# Altium PCB DMX_8.pcbdoc
Units mil, origin at the board's own origin, x right, y up, seen from the top; angles counter-clockwise.
Board outline 4950 x 4640 mil, 1 copper layers (Top Layer); 37 components, 41 nets, 145 pads, 3 vias.
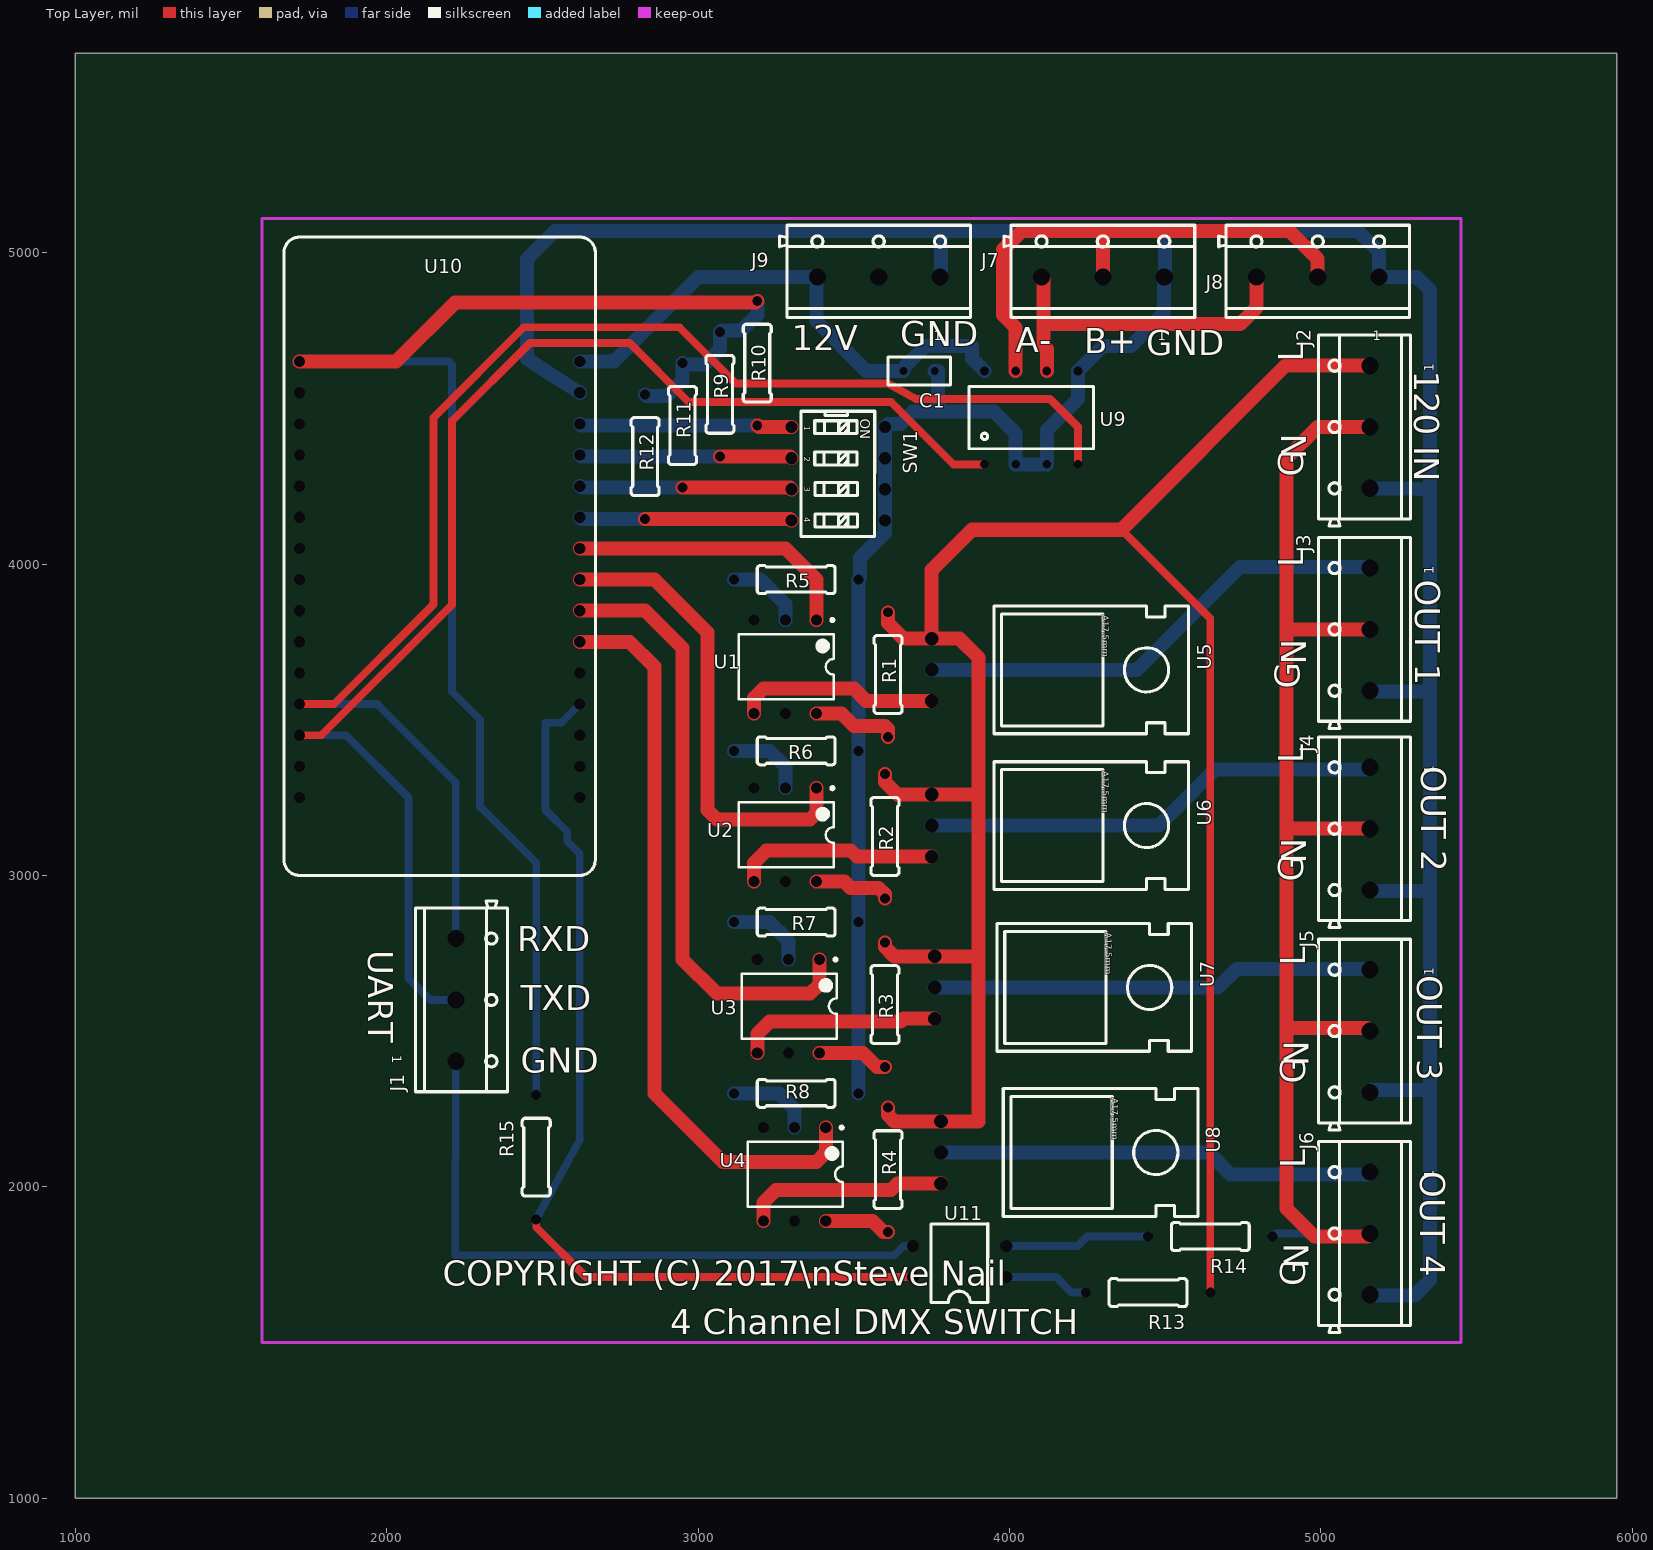
[diagram p0: Top Layer view]
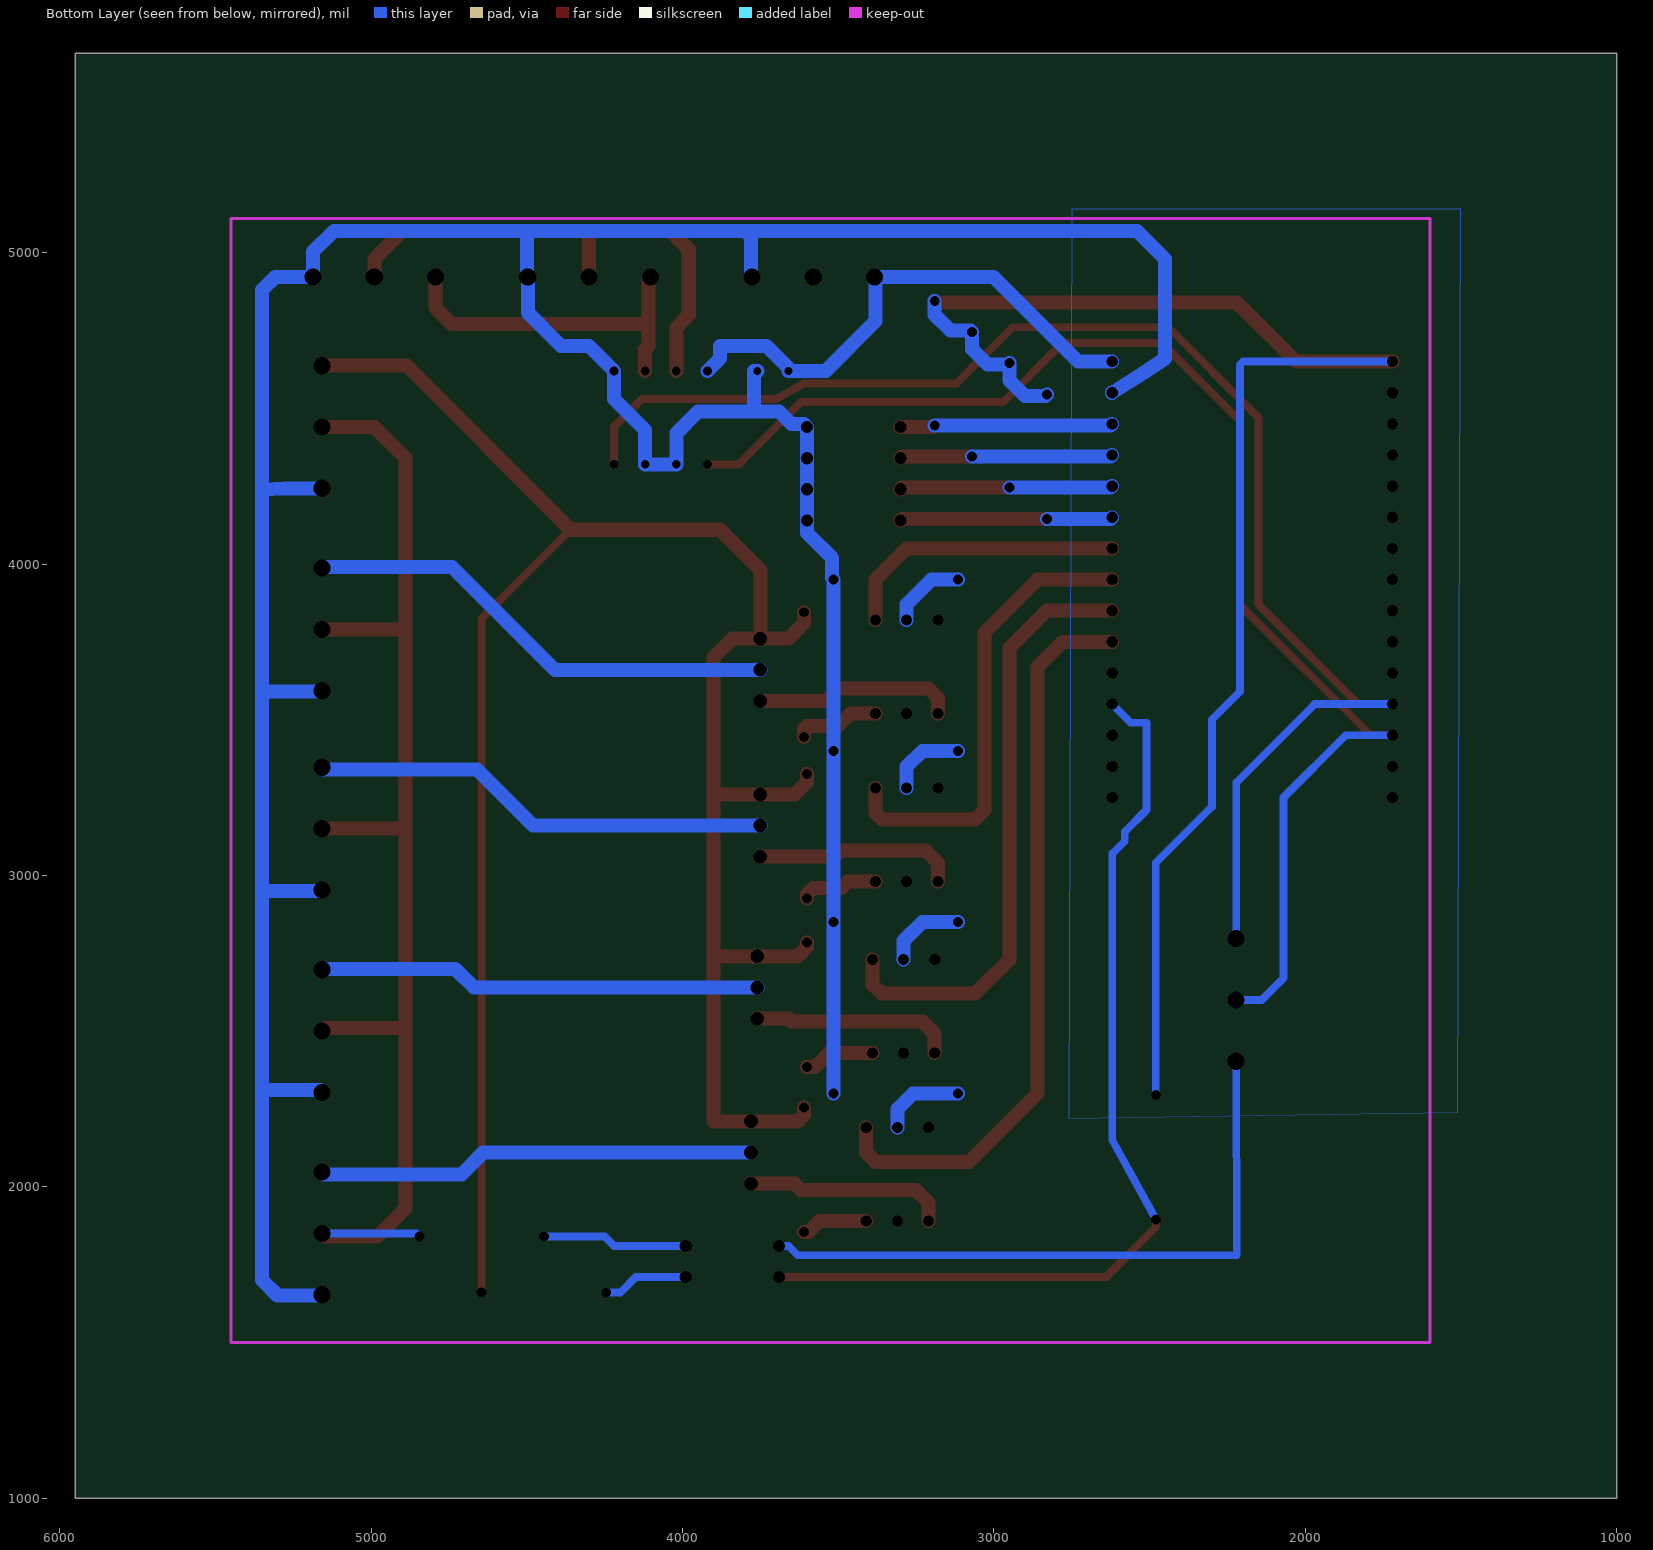
[diagram p1: Bottom Layer view, seen from below]

## Layer stack, top to bottom
Top Layer: signal copper (thickness not stored)

## Board outline
5950,1000 1000,1000 1000,5640 5950,5640

## Components (designator, comment, footprint, x,y, rotation, side; value= is the part's Value field where it differs from the comment)
C1 "CERAMIC-2.54" CERAMIC-2.54 3710,4620 r180 top
J1 "TERMINAL_BLOCK_3P_5" TERMINAL_BLOCK_3P_5 2240,2600 r270 top
J2 "TERMINAL_BLOCK_3P_5" TERMINAL_BLOCK_3P_5 5140,4440 r90 top
J3 "TERMINAL_BLOCK_3P_5" TERMINAL_BLOCK_3P_5 5140,3790 r90 top
J4 "TERMINAL_BLOCK_3P_5" TERMINAL_BLOCK_3P_5 5140,3150 r90 top
J5 "TERMINAL_BLOCK_3P_5" TERMINAL_BLOCK_3P_5 5140,2500 r90 top
J6 "TERMINAL_BLOCK_3P_5" TERMINAL_BLOCK_3P_5 5140,1850 r90 top
J7 "TERMINAL_BLOCK_3P_5" TERMINAL_BLOCK_3P_5 4300,4940 r0 top
J8 "TERMINAL_BLOCK_3P_5" TERMINAL_BLOCK_3P_5 4990,4940 r0 top
J9 "TERMINAL_BLOCK_3P_5" TERMINAL_BLOCK_3P_5 3580,4940 r0 top
R1 "PR-D2.3XL6.5MM" PR-D2.3XL6.5MM 3610,3640 r90 top
R2 "PR-D2.3XL6.5MM" PR-D2.3XL6.5MM 3600,3120 r90 top
R3 "PR-D2.3XL6.5MM" PR-D2.3XL6.5MM 3600,2580 r90 top
R4 "PR-D2.3XL6.5MM" PR-D2.3XL6.5MM 3610,2050 r90 top
R5 "PR-D2.3XL6.5MM" PR-D2.3XL6.5MM 3320,3950 r180 top
R6 "PR-D2.3XL6.5MM" PR-D2.3XL6.5MM 3320,3400 r180 top
R7 "PR-D2.3XL6.5MM" PR-D2.3XL6.5MM 3320,2850 r180 top
R8 "PR-D2.3XL6.5MM" PR-D2.3XL6.5MM 3320,2300 r180 top
R9 "PR-D2.3XL6.5MM" PR-D2.3XL6.5MM 3070,4540 r90 top
R10 "PR-D2.3XL6.5MM" PR-D2.3XL6.5MM 3190,4640 r90 top
R11 "PR-D2.3XL6.5MM" PR-D2.3XL6.5MM 2950,4440 r90 top
R12 "PR-D2.3XL6.5MM" PR-D2.3XL6.5MM 2830,4340 r90 top
R13 "PR-D2.3XL6.5MM" PR-D2.3XL6.5MM 4450,1660 r180 top
R14 "PR-D2.3XL6.5MM" PR-D2.3XL6.5MM 4650,1840 r180 top
R15 "PR-D2.3XL6.5MM" PR-D2.3XL6.5MM 2480,2090 r90 top
SW1 "DIP switchEI-04" "DIP switchEI-04" 3500,4140 r270 top
U1 "DIP-6_300MIL" DIP-6_300MIL 3380,3820 r0 top
U2 "DIP-6_300MIL" DIP-6_300MIL 3380,3280 r0 top
U3 "DIP-6_300MIL" DIP-6_300MIL 3390,2730 r0 top
U4 "DIP-6_300MIL" DIP-6_300MIL 3410,2190 r0 top
U5 "TO220" TO220 4000,3660 r270 top
U6 "TO220" TO220 4000,3160 r270 top
U7 "TO220" TO220 4010,2640 r270 top
U8 "TO220" TO220 4030,2110 r270 top
U9 "DIP8" DIP8 3920,4320 r0 top
U10 "ESP32 DOIT DEVKIT V1" "ESP32 DOIT DEVKIT V1" 1720,4650 r0 top
U11 "DIP-4" DIP-4 3790,1710 r180 top

## Footprints (in the part's own frame and the unit in brackets; to place one, negate y for a bottom-side part, rotate by r counter-clockwise, add the part's x,y. Pads: shape width x height; smd on the part's side, far side on the other; paste and mask are expansions set on the pad)
CERAMIC-2.54 [mil]
  round 0 hole 25: 1(-50,0) 2(50,0)
  silkscreen extent -100,-45 100,45
DIP8 [mil]
  round 0 hole 28: 1(0,0) 2(100,0) 3(200,0) 4(300,0) 5(300,300) 6(200,300) 7(100,300) 8(0,300)
  silkscreen extent -50,50 350,250
"DIP switchEI-04" [mm]
  round 0 hole 1: 1(-7.62,-5.08) 2(-5.08,-5.08) 3(-2.54,-5.08) 4(0,-5.08) 5(0,2.54) 6(-2.54,2.54) 7(-5.08,2.54) 8(-7.62,2.54)
  silkscreen extent -8.91,-4.32 1.3,1.71
DIP-4 [mm]
  round 0 hole 1: 1(-5.08,0) 2(-5.08,-2.54) 3(2.54,-2.54) 4(2.54,0)
  silkscreen extent -3.56,-4.35 1.06,2.09
DIP-6_300MIL [mm]
  round 0 hole 0.9: 1(0,0) 2(-2.54,0) 3(-5.08,0) 4(-5.08,-7.62) 5(-2.54,-7.62) 6(0,-7.62)
  silkscreen extent -6.35,-6.46 1.42,0.12
"ESP32 DOIT DEVKIT V1" [mil]
  round 0 hole 36: 1(0,0) 2(0,-100) 3(0,-200) 4(0,-300) 5(0,-400) 6(0,-500) 7(0,-600) 8(0,-700) 9(0,-800) 10(0,-900) 11(0,-1000) 12(0,-1100) 13(0,-1200) 14(0,-1300) 15(0,-1400) 16(900,-1400) 17(900,-1300) 18(900,-1200) 19(900,-1100) 20(900,-1000) 21(900,-900) 22(900,-800) 23(900,-700) 24(900,-600) 25(900,-500) 26(900,-400) 27(900,-300) 28(900,-200) 29(900,-100) 30(900,0)
  silkscreen extent -50,-1650 950,400
PR-D2.3XL6.5MM [mil]
  round 0 hole 32: 1(-195,0) 2(205,0)
  silkscreen extent -120,-45 130,45
TERMINAL_BLOCK_3P_5 [mil]
  round 0 hole 55.2: 1(197,-18) 2(0,-18) 3(-197,-18)
  silkscreen extent -318,-148 295,148
TO220 [mil]
  round 0 hole 44: 1(-100,-250) 2(0,-250) 3(100,-250)
  silkscreen extent -205,-50 205,575

## Via types
v1: diameter 24.4, hole 12, Top Layer to Bottom Layer, 3 vias

## Nets (pads, with @x,y where several pads share a name; then routed paths per layer and width w, separated by ;. In a path a pad name is that pad's centre, name@x,y a point inside that pad or via, vN(x,y) a via of type N, cw(c..) or ccw(c..) an arc to the next point about the centre after c; other vN are vias at no path point)
3V3: R9.2 R10.2 R11.2 R12.2 R15.2 U10.1 | length 5085.1
  Top Layer w45: U10.1 2030,4650 2220,4840 3185,4840 v1(3190,4845)
  Bottom Layer w25: U10.1 2200,4650 2210,4640 2210,3590 2300,3500 2300,3220 2480,3040 R15.2
  Bottom Layer w45: R12.2 2835,4540 2900,4540 2950,4590 v1(2950,4645) 2955,4640 3020,4640 3070,4690 v1(3070,4745) 3075,4750 3140,4750 3190,4800 v1(3190,4845)
12V: C1.2 J9.3 U9.8 U10.30 | length 1720.7
  Bottom Layer w45: U10.30 2730,4650 3002,4922 J9.3 3380,4919 3380,4780 3540,4620 C1.2 3660,4630 3730,4700 3880,4700 3880,4660 U9.8
$BoardOutlineNet: 
A: J7.3 J8.3 U9.6 | length 1113
  Top Layer w45: J7.3 4110,4915 4110,4770 ; U9.6 4120,4690 4110,4700 4110,4770 ; J8.3 4793,4823 4740,4770 4110,4770
B: J7.2 J8.2 U9.7 | length 1684.7
  Top Layer w45: U9.7 4020,4760 3980,4800 3980,5010 4040,5070 4300,5070 ; J7.2 4300,5040 4300,5070 ; J8.2 4990,4980 4900,5070 4300,5070
GND: C1.1 J1.1 J2.3 J3.3 J4.3 J5.3 J6.3 J7.1 J8.1 J9.1 R5.1 R6.1 R7.1 R8.1 SW1.5 SW1.6 SW1.7 SW1.8 U9.2 U9.3 U9.5 U10.2 U10.29 U11.3 | length 14104.9
  Bottom Layer w25: J1.1 2220,1780 3630,1780 3660,1810 U11.3
  Bottom Layer w45: U10.29 2510,4620 2450,4660 2450,4980 2540,5070 3810,5070 ; R8.1 R7.1 R6.1 R5.1 3520,3955 3520,4020 3600,4100 SW1.5 SW1.6 SW1.7 SW1.8 3610,4450 3650,4450 3690,4490 3900,4490 ; C1.1 3770,4620 3770.37,4490 3950,4490 4020,4420 U9.2 U9.3 4120,4430 4220,4530 U9.5 4300,4700 4390,4700 4497,4807 J7.1 4500,4925 4500,5070 ; J9.1 3780,4925 3780,5050 3800,5070 4500,5070 ; J6.3 5161,1650 5300,1650 5350,1700 5350,2310 ; J5.3 5165,2310 5350,2310 ; J4.3 5161,2950 5350,2950 ; J3.3 5161,3590 5350,3590 ; J2.3 5277,4243 5350,4240 5350,3590 ; 5339.6,4240.4 5350,4250.8 5350,4880 5308,4922 J8.1 5187,5003 5120,5070 4500,5070 ; 5350,2310 5350,2950 ; 5350,2950 5350,3590
L1: J3.1 U5.2 | length 1545.9
  Bottom Layer w45: U5.2 4410,3660 4740,3990 5155,3990 J3.1
L2: J4.1 U6.2 | length 1485.5
  Bottom Layer w45: U6.2 4480,3160 4660,3340 5151,3340 J4.1
L3: J5.1 U7.2 | length 1424.1
  Bottom Layer w45: U7.2 4670,2640 4730,2700 5155,2700 J5.1
L4: J6.1 U8.2 | length 1409.9
  Bottom Layer w45: U8.2 4640,2110 4710,2040 5151,2040 J6.1
LINE: J2.1 R1.2 R2.2 R3.2 R4.2 R13.1 U5.1 U6.1 U7.1 U8.1 | length 7321
  Top Layer w25: 4360,4110 4645,3825 R13.1
  Top Layer w45: R3.2 3600,2770 3630,2740 U7.1 3900,2740 ; R2.2 3600,3300 3640,3260 U6.1 3900,3260 ; R4.2 3610,2230 3630,2210 U8.1 3900,2210 3900,2740 ; R1.2 3610,3810 3660,3760 U5.1 ; J2.1 4887,4637 4360,4110 3880,4110 3750,3980 U5.1 ; U5.1 3840,3760 3900,3700 3900,3260 ; 3900,2740 3900,3260
NEUT: J2.2 J3.2 J4.2 J5.2 J6.2 R14.1 | length 4174.1
  Top Layer w45: 4890,3160 4890,2510 ; 4900,2510 4890,2510 ; J6.2 5148,1840 4980,1840 4890,1930 4890,2510 ; J5.2 5148,2510 4890,2510 ; J4.2 4890,3150 4890,3790 ; J3.2 4890,3790 ; J2.2 4990,4440 4890,4340 4890,3790
  Bottom Layer w25: R14.1 4855,1850 J6.2
R1_1: R1.1 U1.6 | length 275.7
  Top Layer w45: U1.6 3460,3520 3500,3480 3600,3480 3610,3470 R1.1
R2_1: R2.1 U2.6 | length 251.6
  Top Layer w45: U2.6 3410,2980 3470,2980 3490,2960 3580,2960 3600,2940 R2.1
R3_1: R3.1 U3.6 | length 228.6
  Top Layer w45: U3.6 3530,2430 3575,2385 R3.1
R4_1: R4.1 U4.6 | length 214.5
  Top Layer w45: U4.6 3560,1890 3595,1855 R4.1
R13_2: R13.2 U11.1 | length 275.7
  Bottom Layer w25: U11.1 4150,1710 4200,1660 R13.2
RXD: J1.3 U9.4 U10.12 | length 4704.8
  Top Layer w25: U10.12 1830,3550 2150,3870 2150,4470 2440,4760 2940,4760 3120,4580 3610,4580 3700,4530 4130,4530 4220,4440 U9.4
  Bottom Layer w25: U10.12 1970,3550 2222,3298 J1.3
S$126: 
S$128: 
S$130: 
S$133: 
TXD: J1.2 U9.1 U10.13 | length 4422.9
  Top Layer w25: U10.13 1790,3450 2210,3870 2210,4460 2460,4710 2780,4710 2970,4520 3520,4520 3620,4520 3640,4500 3820,4320 U9.1
  Bottom Layer w25: U10.13 1870,3450 2070,3250 2070,2670 2140,2600 J1.2
U1_2: R5.2 U1.2 | length 248.1
  Bottom Layer w45: R5.2 3200,3950 3280,3870 U1.2
U2_1: U2.1 U10.23 | length 1501.1
  Top Layer w45: U10.23 2860,3950 3030,3780 3030,3210 3060,3180 3360,3180 3380,3200 U2.1
U2_2: R6.2 U2.2 | length 255.7
  Bottom Layer w45: R6.2 3230,3400 3280,3350 U2.2
U3_1: U3.1 U10.22 | length 1957.7
  Top Layer w45: U10.22 2830,3850 2950,3730 2950,2730 3060,2620 3360,2620 3390,2650 U3.1
U3_2: R7.2 U3.2 | length 259.9
  Bottom Layer w45: R7.2 3140,2850 3230,2850 3290,2790 U3.2
U4_1: U4.1 U10.21 | length 2376.7
  Top Layer w45: U10.21 2780,3750 2860,3670 2860,2300 3080,2080 3380,2080 3410,2110 U4.1
U4_2: R8.2 U4.2 | length 275.7
  Bottom Layer w45: R8.2 3260,2300 3310,2250 U4.2
U5_3: U1.4 U5.3 | length 649
  Top Layer w45: U1.4 3180,3570 3210,3600 3500,3600 3540,3560 U5.3
U6_3: U2.4 U6.3 | length 654.9
  Top Layer w45: U2.4 3180,3040 3220,3080 3490,3080 3510,3060 U6.3
U7_3: U3.4 U7.3 | length 650.7
  Top Layer w45: U3.4 3190,2490 3230,2530 3650,2530 3660,2540 U7.3
U8_3: U4.4 U8.3 | length 654.9
  Top Layer w45: U4.4 3210,1950 3250,1990 3620,1990 3640,2010 U8.3
U10_24: U1.1 U10.24 | length 931.4
  Top Layer w45: U10.24 3280,4050 3380,3950 U1.1
U10_25: R12.1 SW1.4 U10.25 | length 684.1
  Top Layer w45: R12.1 3295,4145 SW1.4
  Bottom Layer w45: U10.25 2625,4145 R12.1
U10_26: R11.1 SW1.3 U10.26 | length 684.1
  Top Layer w45: R11.1 3295,4245 SW1.3
  Bottom Layer w45: U10.26 2625,4245 R11.1
U10_27: R9.1 SW1.2 U10.27 | length 684.1
  Top Layer w45: R9.1 3295,4345 SW1.2
  Bottom Layer w45: U10.27 2625,4345 R9.1
U10_28: R10.1 SW1.1 U10.28 | length 684.1
  Top Layer w45: R10.1 3195,4440 SW1.1
  Bottom Layer w45: U10.28 2625,4445 R10.1
U11_2: R14.2 U11.2 | length 467.4
  Bottom Layer w25: U11.2 4220,1810 4250,1840 R14.2
ZX: R15.1 U10.19 U11.4 | length 3112.6
  Top Layer w25: R15.1 2480,1870 2640,1710 U11.4
  Bottom Layer w25: R15.1 2620,2150 2620,3070 2580,3110 2580,3140 2510,3210 2510,3490 2560,3490 U10.19
pads on no net: J9.2 U1.3 U1.5 U2.3 U2.5 U3.3 U3.5 U4.3 U4.5 U10.3 U10.4 U10.5 U10.6 U10.7 U10.8 U10.9 U10.10 U10.11 U10.14 U10.15 U10.16 U10.17 U10.18 U10.20

## Polygon pours and split planes (outlines as drawn)
GND on Bottom Layer (solid): 1500,5140 2750,5140 2760,2220 1510,2240

## Silkscreen, mask and mechanical layers (free items; w line width, h text height)
Top Overlay:
  text "GND" at 3650,4700 h80
  text "12V" at 3300,4686.4 h80
  text "A-" at 4020,4680 h80
  text "B+" at 4240,4676.4 h80
  text "GND" at 4440,4670 h80
  text "L" at 4942.7,4650 h80 r90
  text "120 IN" at 5300,4620 h80 r270
  text "N" at 4873.6,4419.1 h80 r270
  text "G" at 4942.7,4280 h80 r90
  text "L" at 4942.7,3990 h80 r90
  text "OUT 1" at 5302.7,3950 h80 r270
  text "N" at 4873.6,3759.1 h80 r270
  text "G" at 4932.7,3600 h80 r90
  text "L" at 4942.7,3360 h80 r90
  text "OUT 2" at 5322.7,3350 h80 r270
  text "N" at 4873.6,3119.1 h80 r270
  text "G" at 4942.7,2980 h80 r90
  text "UART" at 1940,2760 h80 r270
  text "RXD" at 2420,2756.4 h80
  text "L" at 4950,2710 h80 r90
  text "OUT 3" at 5310,2680 h80 r270
  text "TXD" at 2430,2566.4 h80
  text "N" at 4880.9,2469.1 h80 r270
  text "GND" at 2430,2366.4 h80
  text "G" at 4950,2330 h80 r90
  text "L" at 4950,2060 h80 r90
  text "OUT 4" at 5320,2050 h80 r270
  text "N" at 4880.9,1819.1 h80 r270
  text "COPYRIGHT (C) 2017\nSteve Nail" at 2180,1681.8 h80
  text "G" at 4950,1680 h80 r90
  text "4 Channel DMX SWITCH" at 2910,1526.4 h80

## Text inside footprints (layer, text, board x,y; h text height)
J1: Top Overlay "1" at 2018,2423 h30 r270
J2: Top Overlay "1" at 5362,4617 h30 r90
J3: Top Overlay "1" at 5362,3967 h30 r90
J4: Top Overlay "1" at 5362,3327 h30 r90
J5: Top Overlay "1" at 5362,2677 h30 r90
J6: Top Overlay "1" at 5362,2027 h30 r90
J7: Top Overlay "1" at 4477,4718 h30
J8: Top Overlay "1" at 5167,4718 h30
J9: Top Overlay "1" at 3757,4718 h30
SW1: Top Overlay "1" at 3340.96,4443.8 h19.68 r270; Top Overlay "2" at 3341.36,4344.3 h19.68 r270; Top Overlay "3" at 3341.36,4247.5 h19.68 r270; Top Overlay "ON" at 3520.85,4466.8 h31.5 r270; Top Overlay "4" at 3340.56,4150.5 h19.68 r270
U5: Top Overlay "A17,5mm" at 4300,3835 h20 r270; Top Solder "1" at 3985,3785 h30 r270; Top Solder "2" at 3985,3685 h30 r270; Top Solder "3" at 3985,3585 h30 r270
U6: Top Overlay "A17,5mm" at 4300,3335 h20 r270; Top Solder "1" at 3985,3285 h30 r270; Top Solder "2" at 3985,3185 h30 r270; Top Solder "3" at 3985,3085 h30 r270
U7: Top Overlay "A17,5mm" at 4310,2815 h20 r270; Top Solder "1" at 3995,2765 h30 r270; Top Solder "2" at 3995,2665 h30 r270; Top Solder "3" at 3995,2565 h30 r270
U8: Top Overlay "A17,5mm" at 4330,2285 h20 r270; Top Solder "1" at 4015,2235 h30 r270; Top Solder "2" at 4015,2135 h30 r270; Top Solder "3" at 4015,2035 h30 r270